# Altium PCB STM 32 F4 Robusta V1.PcbDoc (part 1 of 7)
Units mm, origin at the board's own origin, x right, y up, seen from the top; angles counter-clockwise.
Board outline 287.78 x 230 mm, 2 copper layers (Top Layer, Bottom Layer); 54 components, 96 nets, 355 pads, 16 vias.
Unrouted connection lines stored in the file: 3.
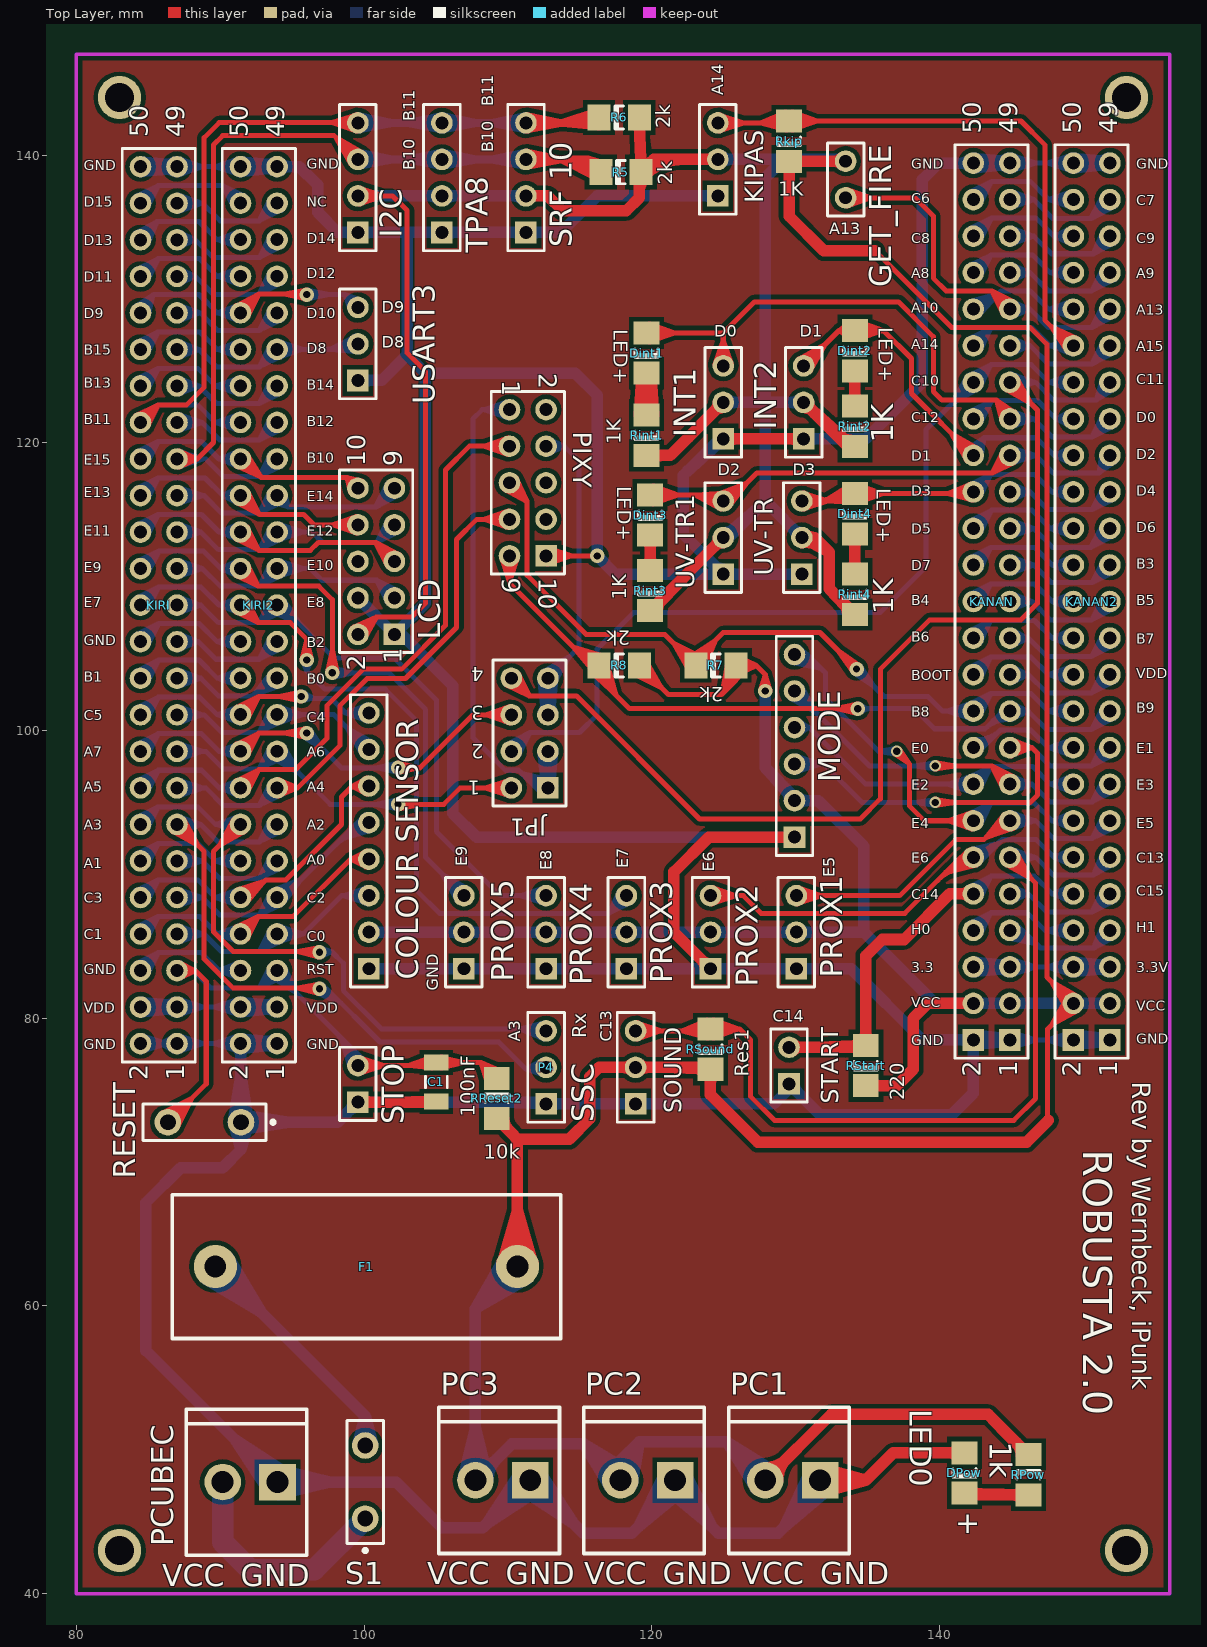
[diagram p0: Top Layer view]
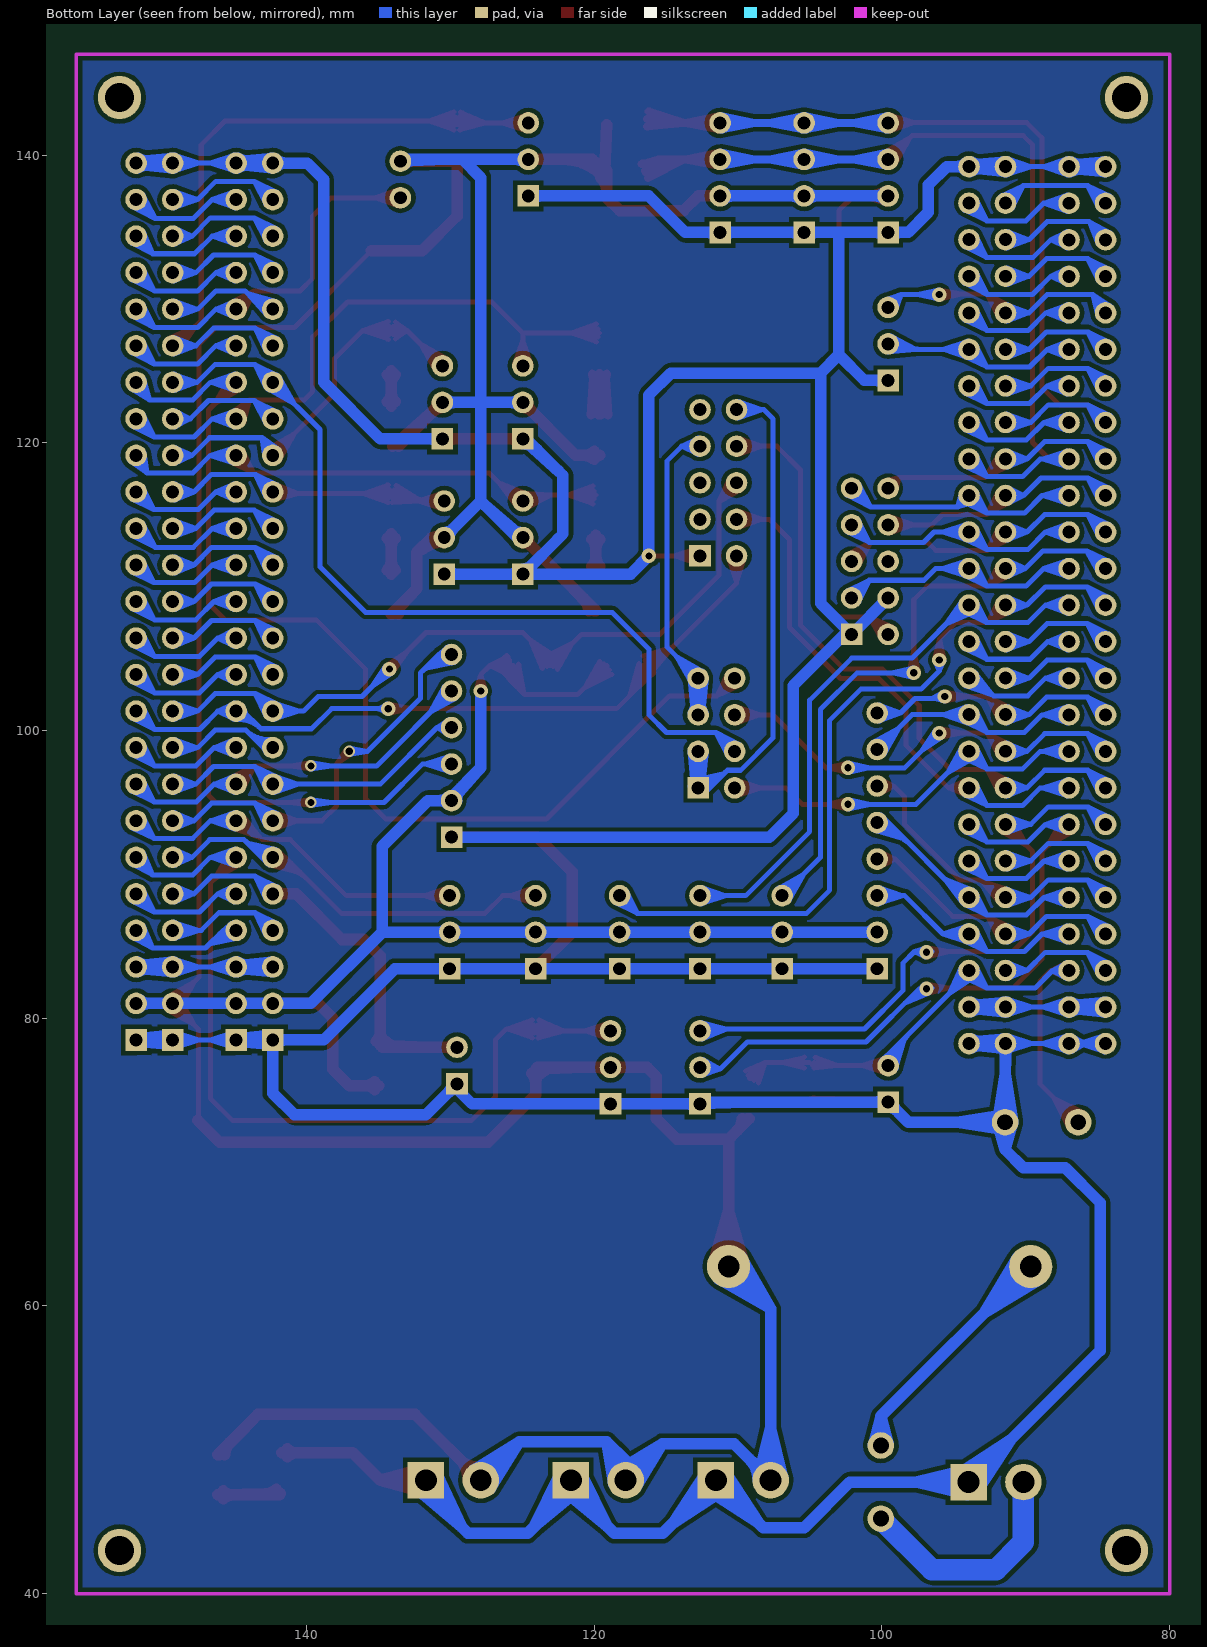
[diagram p1: Bottom Layer view, seen from below]

## Layer stack, top to bottom
Top Solder: solder mask 0.0102, Solder Resist, Dk 3.5
Top Layer: signal copper 0.0356
Dielectric1: dielectric 0.32, FR-4, Dk 4.8
Bottom Layer: signal copper 0.0356
Bottom Solder: solder mask 0.0102, Solder Resist, Dk 3.5

## Board outline
5.461,229.997 4.191,228.727 1.143,228.727 287.655,228.727 288.925,229.997 281.813,222.885 281.813,0 14.478,0 2.667,11.811 4.826,13.97 4.826,14.351

## Design rules (kind name [scope] priority, off if disabled: settings)
Clearance [All] p1: gap=0.3
PolygonConnect [All] p1: connectstyle=Relief reliefconductorwidth=0.254 reliefentries=4 polygonreliefangle="90 Angle" airgapwidth=0.254
RoutingVias [All] p1: holewidth=0.711 width=1.27 viastyle="Through Hole" minholewidth=0.711 minwidth=1.27 maxholewidth=0.711 maxwidth=1.27
SilkToSolderMaskClearance SilkscreenOverComponentPads [IsPad] p1: minsilkscreentomaskgap=0.254 clearancetoexposedcopper=TRUE
SolderMaskExpansion [All] p1: expansion=0.102
Width [All] p1: maxlimit=2 minlimit=0.35 preferedwidth=0.35 minimp=50.000000 maximp=50.000000 favimp=50.000000
28 further rules are at their usual default settings.

## Components (designator, comment, footprint, x,y, rotation, side; value= is the part's Value field where it differs from the comment)
C1 "100nF" C1206 105.029,75.565 r90 top
"COLOUR SENSOR" "Header 8" HDR1X8 100.33,83.439 r90 top
Dint1 "LED+" 1206 119.634,126.238 r90 top
Dint2 "LED+" 1206 134.112,126.407 r90 top
Dint3 "LED+" 1206 119.888,114.977 r90 top
Dint4 "LED+" 1206 134.112,115.062 r90 top
DPow "LED0" 1206 141.732,48.387 r90 top
F1 "Fuse 2" PCBComponent_1 89.662,62.738 r0 top
GET_FIRE "Header 2" HDR1X2#1 133.477,139.573 r270 top
I2C "I2C 1" HDR1X4 99.568,134.62 r90 top
INT1 "Header 3" HDR1X3 124.968,120.269 r90 top
INT2 "Header 3" HDR1X3 130.556,120.269 r90 top
JP1 "Header 4X2" HDR2X4 112.776,96.012 r90 top
KANAN "KANAN" HDR2X25#1 144.89,78.486 r90 top
KANAN2 "KANAN 2" HDR2X25#1 151.845,78.486 r90 top
KIPAS "Header 3" HDR1X3 124.587,137.16 r90 top
KIRI "KIRI" HDR2X25#2 86.995,78.232 r90 top locked
KIRI2 "KIRI 2" HDR2X25#2 93.95,78.237 r90 top
LCD "Header 5X2" HDR2X5#1 102.108,106.68 r90 top
MODE "Header 6" HDR1X6 129.921,92.583 r90 top
P4 "SSC" HDR1X3 112.649,74.041 r90 top
PC1 "Power Connector" "My_ Power_Connector" 124.079,52.959 r0 top
PC2 "Power Connector" "My_ Power_Connector" 114.004,52.959 r0 top
PC3 "Power Connector" "My_ Power_Connector" 103.928,52.959 r0 top
PCUBEC "Power Connector" "My_ Power_Connector" 86.36,52.832 r0 top
PIXY "Header 5X2" HDR2X5#2 110.109,122.301 r270 top
PROX1 "Header 3" HDR1X3 130.048,83.439 r90 top
PROX2 "Header 3" HDR1X3 124.079,83.439 r90 top
PROX3 "Header 3" HDR1X3 118.237,83.439 r90 top
PROX4 "Header 3" HDR1X3 112.649,83.439 r90 top
PROX5 "Header 3" HDR1X3 106.934,83.439 r90 top
R5 "2k" 1206 117.856,138.811 r0 top
R6 "2k" 1206 117.729,142.621 r0 top
R7 "2k" 1206 124.46,104.521 r0 top
R8 "2k" 1206 117.729,104.521 r0 top
RESET "SW-PB" SPST-2 88.9,72.771 r180 top
Rint1 "1K" 1206 119.634,120.523 r90 top
Rint2 "1K" 1206 134.112,121.158 r90 top
Rint3 "1K" 1206 119.888,109.728 r90 top
Rint4 "1K" 1206 134.112,109.474 r90 top
Rkip "1K" 1206 129.54,140.97 r90 top
RPow "1k" 1206 146.177,48.26 r270 top
RReset2 "10k" 1206 109.22,74.422 r270 top
RSound "Res1" 1206 124.079,77.851 r90 top
RStart "220" 1206 134.874,76.708 r90 top
S1 "SW-SPST" SPST-2 100.076,47.752 r90 top
SOUND "Header 3" HDR1X3 118.872,74.041 r90 top
"SRF 10" "I2C 1" HDR1X4 111.252,134.62 r90 top
START "Header 2" HDR1X2#2 129.54,75.438 r90 top
STOP "Header 2" HDR1X2#3 99.568,76.708 r270 top
TPA8 "I2C 1" HDR1X4 105.41,134.62 r90 top (schematic designator "TPA 8")
USART3 "USART 3" HDR1X3 99.568,124.333 r90 top
UV-TR "Header 3" HDR1X3 130.429,110.871 r90 top (schematic designator "UV TRON")
UV-TR1 "Header 3" HDR1X3 124.968,110.871 r90 top (schematic designator "UV TRON-1")

## Footprints (in the part's own frame and the unit in brackets; to place one, negate y for a bottom-side part, rotate by r counter-clockwise, add the part's x,y. Pads: shape width x height; smd on the part's side, far side on the other; paste and mask are expansions set on the pad)
1206 [mm] "Chip Capacitor; Body 3.2 x 1.6 mm (LxW typ)"
  rect 1.6x1.8 smd: 1(-1.4,0) 2(1.4,0)
  silkscreen extent -0.3,-0.8 0.3,0.8
C1206 [mm] "Chip Capacitor, Body 3.2x1.6mm, IPC High Density"
  rect 1.1x1.7 smd: 1(-1.35,0) 2(1.35,0)
  silkscreen extent -0.4,-0.75 0.4,0.75, body extent -1.7,-0.9 1.7,0.9, height 1.3
HDR1X2#1 [mm] "Connector; Header; 2 Position"
  round 1.5 hole 0.9: 1(0,0) 2(2.54,0)
  silkscreen extent -1.27,-1.27 3.81,1.27
HDR1X2#2 [mm] "Connector; Header; 2 Position"
  rect 1.5x1.5 hole 0.9: 1(0,0)
  round 1.5 hole 0.9: 2(2.54,0)
  silkscreen extent -1.27,-1.27 3.81,1.27
HDR1X2#3 [mm] "Connector; Header; 2 Position"
  round 1.5 hole 0.9: 1(0,0)
  rect 1.5x1.5 hole 0.9: 2(2.54,0)
  silkscreen extent -1.27,-1.27 3.81,1.27
HDR1X3 [mm] "Connector; Header; 3 Position"
  rect 1.5x1.5 hole 0.9: 1(0,0)
  round 1.5 hole 0.9: 2(2.54,0) 3(5.08,0)
  silkscreen extent -1.27,-1.27 6.35,1.27
HDR1X4 [mm] "Connector; Header; 4 Position"
  rect 1.5x1.5 hole 0.9: 1(0,0)
  round 1.5 hole 0.9: 2(2.54,0) 3(5.08,0) 4(7.62,0)
  silkscreen extent -1.27,-1.27 8.89,1.27
HDR1X6 [mm] "Connector; Header; 6 Position"
  rect 1.5x1.5 hole 0.9: 1(0,0)
  round 1.5 hole 0.9: 2(2.54,0) 3(5.08,0) 4(7.62,0) 5(10.16,0) 6(12.7,0)
  silkscreen extent -1.27,-1.27 13.97,1.27
HDR1X8 [mm] "Connector; Header; 8 Position"
  rect 1.5x1.5 hole 0.9: 1(0,0)
  round 1.5 hole 0.9: 2(2.54,0) 3(5.08,0) 4(7.62,0) 5(10.16,0) 6(12.7,0) 7(15.24,0) 8(17.78,0)
  silkscreen extent -1.27,-1.27 19.05,1.27
HDR2X4 [mm] "Connector; Header; 4x2 Position"
  rect 1.5x1.5 hole 0.9: 1(0,0)
  round 1.5 hole 0.9: 2(0,2.54) 3(2.54,0) 4(2.54,2.54) 5(5.08,0) 6(5.08,2.54) 7(7.62,0) 8(7.62,2.54)
  silkscreen extent -1.27,-1.27 8.89,3.81
HDR2X5#1 [mm] "Connector; Header; 5x2 Position"
  rect 1.5x1.5 hole 0.9: 1(0,0)
  round 1.5 hole 0.9: 2(0,2.54) 3(2.54,0) 4(2.54,2.54) 5(5.08,0) 6(5.08,2.54) 7(7.62,0) 8(7.62,2.54) 9(10.16,0) 10(10.16,2.54)
  silkscreen extent -1.27,-1.27 11.43,3.81
HDR2X5#2 [mm] "Connector; Header; 5x2 Position"
  round 1.5 hole 0.9: 1(0,0) 2(0,2.54) 3(2.54,0) 4(2.54,2.54) 5(5.08,0) 6(5.08,2.54) 7(7.62,0) 8(7.62,2.54) 9(10.16,0)
  rect 1.5x1.5 hole 0.9: 10(10.16,2.54)
  silkscreen extent -1.27,-1.27 11.43,3.81
HDR2X25#1 [mm] "Connector; Header; 25x2 Position"
  rect 1.5x1.5 hole 0.9: 1(0,0) 2(0,2.54)
  round 1.5 hole 0.9: 3(2.54,0) 4(2.54,2.54) 5(5.08,0) 6(5.08,2.54) 7(7.62,0) 8(7.62,2.54) 9(10.16,0) 10(10.16,2.54) 11(12.7,0) 12(12.7,2.54) 13(15.24,0) 14(15.24,2.54) 15(17.78,0) 16(17.78,2.54) 17(20.32,0) 18(20.32,2.54) 19(22.86,0) 20(22.86,2.54) 21(25.4,0) 22(25.4,2.54) 23(27.94,0) 24(27.94,2.54) 25(30.48,0) 26(30.48,2.54) 27(33.02,0) 28(33.02,2.54) 29(35.56,0) 30(35.56,2.54) 31(38.1,0) 32(38.1,2.54) 33(40.64,0) 34(40.64,2.54) 35(43.18,0) 36(43.18,2.54) 37(45.72,0) 38(45.72,2.54) 39(48.26,0) 40(48.26,2.54) 41(50.8,0) 42(50.8,2.54) 43(53.34,0) 44(53.34,2.54) 45(55.88,0) 46(55.88,2.54) 47(58.42,0) 48(58.42,2.54) 49(60.96,0) 50(60.96,2.54)
  silkscreen extent -1.27,-1.27 62.23,3.81
HDR2X25#2 [mm] "Connector; Header; 25x2 Position"
  round 1.5 hole 0.9: 1(0,0) 2(0,2.54) 3(2.54,0) 4(2.54,2.54) 5(5.08,0) 6(5.08,2.54) 7(7.62,0) 8(7.62,2.54) 9(10.16,0) 10(10.16,2.54) 11(12.7,0) 12(12.7,2.54) 13(15.24,0) 14(15.24,2.54) 15(17.78,0) 16(17.78,2.54) 17(20.32,0) 18(20.32,2.54) 19(22.86,0) 20(22.86,2.54) 21(25.4,0) 22(25.4,2.54) 23(27.94,0) 24(27.94,2.54) 25(30.48,0) 26(30.48,2.54) 27(33.02,0) 28(33.02,2.54) 29(35.56,0) 30(35.56,2.54) 31(38.1,0) 32(38.1,2.54) 33(40.64,0) 34(40.64,2.54) 35(43.18,0) 36(43.18,2.54) 37(45.72,0) 38(45.72,2.54) 39(48.26,0) 40(48.26,2.54) 41(50.8,0) 42(50.8,2.54) 43(53.34,0) 44(53.34,2.54) 45(55.88,0) 46(55.88,2.54) 47(58.42,0) 48(58.42,2.54) 49(60.96,0) 50(60.96,2.54)
  silkscreen extent -1.27,-1.27 62.23,3.81
"My_ Power_Connector" [mil]
  round 100 hole 60: 1(150,-200)
  rect 100x100 hole 60: 2(300,-200)
  silkscreen extent 50,-400 380,0
PCBComponent_1 [mm]
  round 3 hole 1.5: 1(0,0) 2(21,0)
  silkscreen extent -3,-5 24,5
SPST-2 [mm] "Circuit Breaker; 2 Leads"
  round 1.85 hole 1.1: 1(-2.54,0) 2(2.54,0)
  silkscreen extent -4.89,-1.27 4.28,1.27

## Part data
C1: library part Cap, "Capacitor"
"COLOUR SENSOR": "Header, 8-Pin"
Dint1 Dint2 Dint3 Dint4: library part LED0, "Typical INFRARED GaAs LED"
DPow: "Typical INFRARED GaAs LED"
F1: "Fuse"
GET_FIRE START STOP: "Header, 2-Pin"
I2C "SRF 10" TPA8: library part "Header 4", "Header, 4-Pin"
INT1 INT2 KIPAS PROX1 PROX2 PROX3 PROX4 PROX5 SOUND UV-TR UV-TR1: "Header, 3-Pin"
JP1: "Header, 4-Pin, Dual row"
KANAN KANAN2 KIRI KIRI2: library part "Header 25X2", "Header, 25-Pin, Dual row"
LCD PIXY: "Header, 5-Pin, Dual row"
MODE: "Header, 6-Pin"
P4 USART3: library part "Header 3", "Header, 3-Pin"
PC1 PC2 PC3 PCUBEC: "white Power Connector"
R5 R6 R7 R8: library part Res2, "Resistor"
RESET: "Switch"
Rint1 Rint2 Rint3 Rint4 Rkip RPow RReset2 RStart: library part Res1, "Resistor"
RSound: "Resistor"
S1: "Single-Pole, Single-Throw Switch"

## Free pads (board coordinates)
  round 3 hole 2: 0(83,144) 1(153,144) 2(83,43) 2(153,43)

## Via types
v1: diameter 1, hole 0.5, Top Layer to Bottom Layer, 13 vias
v2: diameter 0.8, hole 0.5, Top Layer to Bottom Layer, 3 vias

## Nets (pads, with @x,y where several pads share a name; then routed paths per layer and width w, separated by ;. In a path a pad name is that pad's centre, name@x,y a point inside that pad or via, vN(x,y) a via of type N, cw(c..) or ccw(c..) an arc to the next point about the centre after c; other vN are vias at no path point)
GND: "COLOUR SENSOR.1" "SRF 10.1" C1.1 DPow.2 I2C.1 INT1.1 INT2.1 KANAN2.1 KANAN2.2 KANAN2.49 KANAN2.50 KANAN.1 KANAN.2 KANAN.49 KANAN.50 KIPAS.1 KIRI2.1 KIRI2.2 KIRI2.6 KIRI2.24 KIRI2.49 KIRI2.50 KIRI.1 KIRI.2 KIRI.6 KIRI.24 KIRI.49 KIRI.50 LCD.1 LCD.4 MODE.1 P4.1 PC1.2 PC2.2 PC3.2 PCUBEC.2 PIXY.10 PROX1.1 PROX2.1 PROX3.1 PROX4.1 PROX5.1 RESET.1 SOUND.1 START.1 STOP.2 TPA8.1 USART3.1 UV-TR1.1 UV-TR.1 | length 1569.1
  Top Layer w0.35: PIXY.10@112.649,112.141 v1(116.205,112.141) ; PIXY.10@112.663,111.916 114.449,112.141 ; PIXY.10@112.663,112.366 114.449,112.141 ; PIXY.10@112.741,111.573 114.449,112.141 ; PIXY.10@112.741,112.709 114.449,112.141
  Top Layer w0.8: STOP.2@99.568,74.168 C1.1@104.982,74.168 ; STOP.2@99.815,73.921 cw(c100.413,73.323) 100.413,74.168 cw(c100.413,75.013) STOP.2@99.815,74.415 ; 101.778,74.168 C1.1@104.729,74.215 ; 121.632,85.886 PROX2.1@124.079,83.439 121.539,85.979 121.539,90.17 123.952,92.583 MODE.1@129.921,92.583 ; PROX2.1@123.729,83.439 ccw(c122.884,83.439) 123.482,84.036 ccw(c124.079,84.634) PROX2.1@124.079,83.789 ; INT1.1@124.968,120.269 INT2.1@130.556,120.269 127.406,120.269 ; INT1.1@125.215,120.022 cw(c125.813,119.424) 125.813,120.269 cw(c125.813,121.114) INT1.1@125.215,120.516 ; MODE.1@129.674,92.336 ccw(c129.076,91.738) 129.076,92.583 ccw(c129.076,93.428) MODE.1@129.674,92.83 ; INT2.1@130.309,120.022 ccw(c129.711,119.424) 129.711,120.269 ccw(c129.711,121.114) INT2.1@130.309,120.516 ; PC1.2@131.818,47.017 134.874,47.879 ; PC1.2@131.818,48.741 134.874,47.879 ; PC1.2@131.903,47.033 133.256,47.807 ; PC1.2@131.903,48.725 133.256,47.951 ; PC1.2@131.98,47.056 133.256,47.951 ; PC1.2@131.98,48.702 133.256,47.807 ; PC1.2@132.314,47.264 cw(c133.799,45.779) 133.799,47.879 cw(c133.799,49.979) PC1.2@132.314,48.494 ; 138.432,49.787 DPow.2@141.632,49.787 ; DPow.2@141.349,49.504 ccw(c140.666,48.821) 140.666,49.787 ccw(c140.666,50.753) DPow.2@141.349,50.07 ; DPow.2@141.732,49.787 136.782,49.787 134.874,47.879 ; PC1.2@131.699,47.879 133.256,47.951 ; PC1.2@131.699,47.879 133.256,47.807 ; PC1.2@131.699,47.879 134.874,47.879
  Bottom Layer w0.35: KIRI.6@84.119,83.778 85.725,84.582 ; KIRI.24@84.119,106.638 85.725,107.442 ; KIRI.24@84.155,106.663 85.149,106.933 ; KIRI.24@84.202,106.688 85.216,106.866 ; KIRI.6@84.306,83.481 85.725,84.582 ; KIRI.24@84.322,106.354 85.216,106.866 ; KIRI.50@84.423,138.969 KIRI.49@86.357,138.806 ; KIRI.50@84.423,139.415 KIRI.49@86.357,139.578 ; KIRI.50@84.425,138.618 KIRI.49@86.357,138.806 ; KIRI.50@84.425,139.766 KIRI.49@86.357,139.578 ; KIRI.50@84.452,138.967 KIRI.49@86.304,139.053 ; KIRI.50@84.452,139.417 KIRI.49@86.304,139.331 ; KIRI.2@84.455,78.232 KIRI.1@86.255,78.237 ; KIRI.6@84.455,83.312 85.725,84.582 ; KIRI.24@84.455,106.747 ccw(c84.455,108.135) 85.437,107.154 ccw(c86.418,106.172) KIRI.24@85.03,106.172 ; KIRI.2@84.46,78.237 KIRI2.2@91.41,78.237 ; KIRI.2@84.468,78.457 KIRI.1@86.255,78.237 ; KIRI.2@84.47,78.007 KIRI.1@86.255,78.237 ; KIRI.50@84.486,138.969 KIRI.49@86.304,139.331 ; KIRI.50@84.486,139.415 KIRI.49@86.304,139.053 ; KIRI.50@84.49,138.97 85.484,139.239 ; KIRI.50@84.49,139.414 85.484,139.145 ; KIRI.50@84.501,138.619 KIRI.49@86.304,139.053 ; KIRI.50@84.501,139.765 KIRI.49@86.304,139.331 ; KIRI.50@84.512,138.974 KIRI.49@86.357,139.578 ; KIRI.50@84.512,139.41 KIRI.49@86.357,138.806 ; KIRI.2@84.545,78.8 KIRI.1@86.255,78.237 ; KIRI.50@84.547,138.624 KIRI.49@86.255,139.192 ; KIRI.50@84.547,139.76 KIRI.49@86.255,139.192 ; KIRI.2@84.548,77.665 KIRI.1@86.255,78.237 ; KIRI.50@84.587,138.632 KIRI.49@86.304,139.331 ; KIRI.50@84.587,139.752 KIRI.49@86.304,139.053 ; KIRI.50@84.59,138.633 85.484,139.145 ; KIRI.50@84.59,139.751 85.484,139.239 ; KIRI.6@84.624,83.163 85.725,84.582 ; KIRI.24@84.637,106.039 85.149,106.933 ; KIRI.50@84.641,138.648 85.484,139.239 ; KIRI.50@84.641,139.736 85.484,139.145 ; KIRI.50@84.652,138.652 KIRI.49@86.357,139.578 ; KIRI.50@84.652,139.732 KIRI.49@86.357,138.806 ; KIRI.50@84.862,138.785 cw(c85.843,137.804) 85.843,139.192 cw(c85.843,140.58) KIRI.50@84.862,139.599 ; KIRI.6@84.921,82.976 85.725,84.582 ; KIRI.24@84.921,105.836 85.725,107.442 ; KIRI.24@84.946,105.872 85.216,106.866 ; KIRI.24@84.971,105.919 85.149,106.933 ; 85.595,78.237 cw(c85.595,76.832) KIRI.1@86.588,77.825 ; 85.619,78.237 ccw(c85.619,79.608) KIRI.1@86.588,78.639 ; KIRI.49@86.588,138.785 ccw(c85.607,137.804) 85.607,139.192 ccw(c85.607,140.58) KIRI.49@86.588,139.599 ; KIRI.1@86.806,77.689 85.974,78.284 ; KIRI.49@86.809,138.648 85.966,139.239 ; KIRI.49@86.809,139.736 85.966,139.145 ; KIRI.1@86.813,78.777 85.958,78.189 ; KIRI.1@86.859,77.673 85.958,78.189 ; KIRI.49@86.86,138.633 85.966,139.145 ; KIRI.49@86.86,139.751 85.966,139.239 ; KIRI.1@86.861,78.791 85.974,78.284 ; KIRI.49@86.903,138.624 KIRI.50@85.195,139.192 ; KIRI.49@86.903,139.76 KIRI.50@85.195,139.192 ; KIRI.1@86.959,78.01 85.974,78.284 ; KIRI.49@86.96,138.97 85.966,139.239 ; KIRI.49@86.96,139.414 85.966,139.145 ; KIRI.1@86.961,78.454 85.958,78.189 ; KIRI.1@86.98,78.008 85.958,78.189 ; KIRI.1@86.982,78.457 85.974,78.284 ; KIRI.1@87.029,78.454 88.032,78.189 ; KIRI.49@87.03,138.97 88.024,139.239 ; KIRI.49@87.03,139.414 88.024,139.145 ; KIRI.1@87.031,78.01 88.016,78.284 ; KIRI.1@87.085,78.8 88.795,78.237 ; KIRI.49@87.087,138.624 88.795,139.192 ; KIRI.49@87.087,139.76 88.795,139.192 ; KIRI.1@87.088,77.665 88.795,78.237 ; KIRI.1@87.129,78.791 88.016,78.284 ; KIRI.49@87.13,138.633 88.024,139.145 ; KIRI.49@87.13,139.751 88.024,139.239 ; KIRI.1@87.131,77.673 88.032,78.189 ; KIRI.1@87.177,78.777 88.032,78.189 ; KIRI.49@87.181,138.648 88.024,139.239 ; KIRI.49@87.181,139.736 88.024,139.145 ; KIRI.1@87.184,77.689 88.016,78.284 ; KIRI.1@87.402,77.825 cw(c88.395,76.832) 88.395,78.237 ; KIRI.1@87.402,78.639 ccw(c88.371,79.608) 88.371,78.237 ; KIRI.49@87.402,138.785 cw(c88.383,137.804) 88.383,139.192 cw(c88.383,140.58) KIRI.49@87.402,139.599 ; 90.01,139.192 ccw(c90.01,140.597) KIRI2.50@91.003,139.604 ; 90.034,139.192 cw(c90.034,137.821) KIRI2.50@91.003,138.79 ; KIRI2.2@91.003,77.83 ccw(c90.022,76.849) 90.022,78.237 ccw(c90.022,79.625) KIRI2.2@91.003,78.644 ; KIRI2.6@91.003,82.91 ccw(c90.022,81.929) 90.022,83.317 ccw(c90.022,84.705) KIRI2.6@91.003,83.724 ; KIRI2.24@91.003,105.77 ccw(c90.022,104.789) 90.022,106.177 ccw(c90.022,107.565) KIRI2.24@91.003,106.584 ; KIRI2.50@91.221,139.74 90.389,139.145 ; KIRI2.2@91.224,77.693 90.381,78.284 ; KIRI2.2@91.224,78.781 90.381,78.19 ; KIRI2.6@91.224,82.773 90.381,83.364 ; KIRI2.6@91.224,83.861 90.381,83.27 ; KIRI2.24@91.224,105.633 90.381,106.224 ; KIRI2.24@91.224,106.721 90.381,106.13 ; KIRI2.50@91.228,138.652 90.373,139.24 ; KIRI2.50@91.274,139.756 90.373,139.24 ; KIRI2.2@91.275,77.678 90.381,78.19 ; KIRI2.2@91.275,78.796 90.381,78.284 ; KIRI2.6@91.275,82.758 90.381,83.27 ; KIRI2.6@91.275,83.876 90.381,83.364 ; KIRI2.24@91.275,105.618 90.381,106.13 ; KIRI2.24@91.275,106.736 90.381,106.224 ; KIRI2.50@91.276,138.638 90.389,139.145 ; KIRI2.6@91.3,82.753 89.911,83.317 ; KIRI2.6@91.3,83.881 89.911,83.317 ; KIRI2.24@91.308,105.611 89.784,106.177 ; KIRI2.24@91.308,106.743 89.784,106.177 ; KIRI2.50@91.317,139.764 89.61,139.192 ; KIRI2.2@91.318,77.669 89.61,78.237 ; KIRI2.2@91.318,78.805 89.61,78.237 ; KIRI2.50@91.32,138.629 89.61,139.192 ; KIRI2.50@91.374,139.419 90.389,139.145 ; KIRI2.2@91.375,78.015 90.381,78.284 ; KIRI2.2@91.375,78.459 90.381,78.19 ; KIRI2.6@91.375,83.095 90.381,83.364 ; KIRI2.6@91.375,83.539 90.381,83.27 ; KIRI2.24@91.375,105.955 90.381,106.224 ; KIRI2.24@91.375,106.399 90.381,106.13 ; KIRI2.50@91.376,138.975 90.373,139.24 ; KIRI2.2@91.378,78.014 KIRI2.1@93.312,77.851 ; KIRI2.2@91.378,78.46 KIRI2.1@93.312,78.623 ; KIRI2.50@91.378,138.974 KIRI2.49@93.308,138.811 ; KIRI2.50@91.378,139.42 KIRI2.49@93.315,139.583 ; KIRI2.2@91.38,77.663 KIRI2.1@93.312,77.851 ; KIRI2.2@91.38,78.811 KIRI2.1@93.312,78.623 ; KIRI2.50@91.38,138.623 KIRI2.49@93.308,138.811 ; KIRI2.50@91.38,139.771 KIRI2.49@93.315,139.583 ; KIRI2.6@91.393,83.093 89.911,83.317 ; KIRI2.6@91.393,83.541 89.911,83.317 ; KIRI2.24@91.394,105.953 89.784,106.177 ; KIRI2.24@91.394,106.401 89.784,106.177 ; KIRI2.50@91.395,139.421 90.373,139.24 ; KIRI2.6@91.396,83.092 90.381,83.27 ; KIRI2.6@91.396,83.542 90.381,83.364 ; KIRI2.24@91.396,105.952 90.381,106.13 ; KIRI2.24@91.396,106.402 90.381,106.224 ; KIRI2.50@91.395,139.422 89.61,139.192 ; KIRI2.2@91.407,78.012 KIRI2.1@93.259,78.098 ; KIRI2.2@91.407,78.462 KIRI2.1@93.259,78.376 ; KIRI2.50@91.407,138.972 KIRI2.49@93.254,139.056 ; KIRI2.50@91.407,139.422 KIRI2.49@93.263,139.335 ; KIRI2.2@91.424,78.012 92.439,78.19 ; KIRI2.2@91.424,78.462 92.439,78.284 ; KIRI2.2@91.44,78.014 KIRI2.1@93.259,78.376 ; KIRI2.2@91.44,78.46 KIRI2.1@93.259,78.098 ; KIRI2.50@91.44,138.974 KIRI2.49@93.263,139.335 ; KIRI2.50@91.441,139.42 KIRI2.49@93.254,139.056 ; KIRI2.50@91.444,138.975 92.446,139.24 ; KIRI2.2@91.445,78.015 92.439,78.284 ; KIRI2.2@91.445,78.459 92.439,78.19 ; KIRI2.50@91.446,139.419 92.431,139.145 ; KIRI2.2@91.456,77.664 KIRI2.1@93.259,78.098 ; KIRI2.2@91.456,78.81 KIRI2.1@93.259,78.376 ; KIRI2.50@91.456,138.624 KIRI2.49@93.254,139.056 ; KIRI2.50@91.456,139.77 KIRI2.49@93.263,139.335 ; KIRI2.2@91.467,78.019 KIRI2.1@93.312,78.623 ; KIRI2.2@91.467,78.455 KIRI2.1@93.312,77.851 ; KIRI2.50@91.467,138.979 KIRI2.49@93.315,139.583 ; KIRI2.50@91.468,139.414 KIRI2.49@93.308,138.811 ; KIRI2.50@91.5,138.629 KIRI2.49@93.21,139.192 ; KIRI2.50@91.501,138.629 KIRI2.49@93.211,139.195 ; KIRI2.50@91.502,139.765 KIRI2.49@93.211,139.195 ; KIRI2.50@91.503,139.764 KIRI2.49@93.21,139.192 ; KIRI2.50@91.541,138.637 KIRI2.49@93.263,139.335 ; KIRI2.2@91.542,77.677 KIRI2.1@93.259,78.376 ; KIRI2.2@91.542,78.797 KIRI2.1@93.259,78.098 ; KIRI2.50@91.542,139.757 KIRI2.49@93.254,139.056 ; KIRI2.50@91.544,138.638 92.431,139.145 ; KIRI2.2@91.545,77.678 92.439,78.19 ; KIRI2.2@91.545,78.796 92.439,78.284 ; KIRI2.50@91.546,139.756 92.446,139.24 ; KIRI2.50@91.592,138.652 92.446,139.24 ; KIRI2.2@91.596,77.693 92.439,78.284 ; KIRI2.2@91.596,78.781 92.439,78.19 ; KIRI2.50@91.599,139.74 92.431,139.145 ; KIRI2.2@91.607,77.697 KIRI2.1@93.312,78.623 ; KIRI2.2@91.607,78.777 KIRI2.1@93.312,77.851 ; KIRI2.50@91.606,138.656 KIRI2.49@93.315,139.583 ; KIRI2.50@91.607,139.737 KIRI2.49@93.308,138.811 ; KIRI2.2@91.817,77.83 cw(c92.798,76.849) 92.798,78.237 cw(c92.798,79.625) KIRI2.2@91.817,78.644 ; KIRI2.50@91.817,138.79 cw(c92.786,137.821) 92.786,139.192 ; KIRI2.50@91.817,139.604 ccw(c92.81,140.597) 92.81,139.192 ; 92.55,139.192 ccw(c92.55,140.597) KIRI2.49@93.543,139.604 ; 92.574,139.192 cw(c92.574,137.821) KIRI2.49@93.543,138.79 ; KIRI2.1@93.543,77.83 ccw(c92.562,76.849) 92.562,78.237 ccw(c92.562,79.625) KIRI2.1@93.543,78.644 ; KIRI2.49@93.761,139.74 92.929,139.145 ; KIRI2.1@93.764,77.693 92.921,78.284 ; KIRI2.1@93.764,78.781 92.921,78.19 ; KIRI2.49@93.768,138.652 92.913,139.24 ; KIRI2.49@93.814,139.756 92.913,139.24 ; KIRI2.1@93.815,77.678 92.921,78.19 ; KIRI2.1@93.815,78.796 92.921,78.284 ; KIRI2.49@93.816,138.638 92.929,139.145 ; KIRI2.49@93.857,139.764 KIRI2.50@92.15,139.192 ; KIRI2.1@93.858,77.669 KIRI2.2@92.15,78.237 ; KIRI2.1@93.858,78.805 KIRI2.2@92.15,78.237 ; KIRI2.49@93.86,138.629 KIRI2.50@92.15,139.192 ; KIRI2.49@93.914,139.419 92.929,139.145 ; KIRI2.1@93.915,78.015 92.921,78.284 ; KIRI2.1@93.915,78.459 92.921,78.19 ; KIRI2.49@93.916,138.975 92.913,139.24 ; KIRI2.49@93.935,139.421 92.913,139.24 ; KIRI2.49@93.935,139.422 KIRI2.50@92.15,139.192 ; KIRI2.49@93.945,139.192 KIRI.49@86.995,139.192 ; KANAN.2@142.318,78.263 KANAN.1@144.252,78.1 ; KANAN.2@142.318,78.709 KANAN.1@144.252,78.872 ; KANAN.50@142.318,139.223 KANAN.49@144.252,139.06 ; KANAN.50@142.318,139.669 KANAN.49@144.252,139.832 ; KANAN.2@142.32,77.912 KANAN.1@144.252,78.1 ; KANAN.2@142.32,79.06 KANAN.1@144.252,78.872 ; KANAN.50@142.32,138.872 KANAN.49@144.252,139.06 ; KANAN.50@142.32,140.02 KANAN.49@144.252,139.832 ; KANAN.2@142.347,78.261 KANAN.1@144.199,78.347 ; KANAN.2@142.347,78.711 KANAN.1@144.199,78.625 ; KANAN.50@142.347,139.221 KANAN.49@144.199,139.307 ; KANAN.50@142.347,139.671 KANAN.49@144.199,139.585 ; KANAN.2@142.38,78.263 KANAN.1@144.199,78.625 ; KANAN.2@142.38,78.709 KANAN.1@144.199,78.347 ; KANAN.50@142.38,139.223 KANAN.49@144.199,139.585 ; KANAN.50@142.38,139.669 KANAN.49@144.199,139.307 ; KANAN.2@142.385,78.264 143.379,78.533 ; KANAN.2@142.385,78.708 143.379,78.439 ; KANAN.50@142.385,139.224 143.379,139.493 ; KANAN.50@142.385,139.668 143.379,139.399 ; KANAN.2@142.396,77.913 KANAN.1@144.199,78.347 ; KANAN.2@142.396,79.059 KANAN.1@144.199,78.625 ; KANAN.50@142.396,138.873 KANAN.49@144.199,139.307 ; KANAN.50@142.396,140.019 KANAN.49@144.199,139.585 ; KANAN.2@142.407,78.268 KANAN.1@144.252,78.872 ; KANAN.2@142.407,78.704 KANAN.1@144.252,78.1 ; KANAN.50@142.407,139.228 KANAN.49@144.252,139.832 ; KANAN.50@142.407,139.664 KANAN.49@144.252,139.06 ; KANAN.2@142.442,77.918 KANAN.1@144.15,78.486 ; KANAN.2@142.442,79.054 KANAN.1@144.15,78.486 ; KANAN.50@142.442,138.878 KANAN.49@144.15,139.446 ; KANAN.50@142.442,140.014 KANAN.49@144.15,139.446 ; KANAN.2@142.482,77.926 KANAN.1@144.199,78.625 ; KANAN.2@142.482,79.046 KANAN.1@144.199,78.347 ; KANAN.50@142.482,138.886 KANAN.49@144.199,139.585 ; KANAN.50@142.482,140.006 KANAN.49@144.199,139.307 ; KANAN.2@142.485,77.927 143.379,78.439 ; KANAN.2@142.485,79.045 143.379,78.533 ; KANAN.50@142.485,138.887 143.379,139.399 ; KANAN.50@142.485,140.005 143.379,139.493 ; KANAN.2@142.536,77.942 143.379,78.533 ; KANAN.2@142.536,79.03 143.379,78.439 ; KANAN.50@142.536,138.902 143.379,139.493 ; KANAN.50@142.536,139.99 143.379,139.399 ; KANAN.2@142.547,77.946 KANAN.1@144.252,78.872 ; KANAN.2@142.547,79.026 KANAN.1@144.252,78.1 ; KANAN.50@142.547,138.906 KANAN.49@144.252,139.832 ; KANAN.50@142.547,139.986 KANAN.49@144.252,139.06 ; KANAN.2@142.757,78.079 cw(c143.738,77.098) 143.738,78.486 cw(c143.738,79.874) KANAN.2@142.757,78.893 ; KANAN.50@142.757,139.039 cw(c143.738,138.058) 143.738,139.446 cw(c143.738,140.834) KANAN.50@142.757,139.853 ; KANAN.1@144.483,78.079 ccw(c143.502,77.098) 143.502,78.486 ccw(c143.502,79.874) KANAN.1@144.483,78.893 ; KANAN.49@144.483,139.039 ccw(c143.502,138.058) 143.502,139.446 ccw(c143.502,140.834) KANAN.49@144.483,139.853 ; KANAN.1@144.704,77.942 143.861,78.533 ; KANAN.1@144.704,79.03 143.861,78.439 ; KANAN.49@144.704,138.902 143.861,139.493 ; KANAN.49@144.704,139.99 143.861,139.399 ; KANAN.1@144.755,77.927 143.861,78.439 ; KANAN.1@144.755,79.045 143.861,78.533 ; KANAN.49@144.755,138.887 143.861,139.399 ; KANAN.49@144.755,140.005 143.861,139.493 ; KANAN.1@144.798,77.918 KANAN.2@143.09,78.486 ; KANAN.1@144.798,79.054 KANAN.2@143.09,78.486 ; KANAN.49@144.798,138.878 KANAN.50@143.09,139.446 ; KANAN.49@144.798,140.014 KANAN.50@143.09,139.446 ; KANAN.1@144.855,78.264 143.861,78.533 ; KANAN.1@144.855,78.708 143.861,78.439 ; KANAN.49@144.855,139.224 143.861,139.493 ; KANAN.49@144.855,139.668 143.861,139.399 ; KANAN.1@144.876,78.261 143.861,78.439 ; KANAN.1@144.876,78.711 143.861,78.533 ; KANAN.49@144.876,139.221 143.861,139.399 ; KANAN.49@144.876,139.671 143.861,139.493 ; KANAN.1@144.876,78.261 KANAN.2@143.09,78.486 ; KANAN.1@144.876,78.711 KANAN.2@143.09,78.486 ; KANAN.49@144.876,139.221 KANAN.50@143.09,139.446 ; KANAN.49@144.876,139.671 KANAN.50@143.09,139.446 ; KANAN.1@144.925,78.264 145.919,78.533 ; KANAN.1@144.925,78.708 145.919,78.439 ; KANAN.49@144.925,139.224 145.919,139.493 ; KANAN.49@144.925,139.668 145.919,139.399 ; KANAN.1@144.982,77.918 146.69,78.486 ; KANAN.1@144.982,79.054 146.69,78.486 ; KANAN.49@144.982,138.878 146.69,139.446 ; KANAN.49@144.982,140.014 146.69,139.446 ; KANAN.1@145.025,77.927 145.919,78.439 ; KANAN.1@145.025,79.045 145.919,78.533 ; KANAN.49@145.025,138.887 145.919,139.399 ; KANAN.49@145.025,140.005 145.919,139.493 ; KANAN.1@145.076,77.942 145.919,78.533 ; KANAN.1@145.076,79.03 145.919,78.439 ; KANAN.49@145.076,138.902 145.919,139.493 ; KANAN.49@145.076,139.99 145.919,139.399 ; KANAN.1@145.297,78.079 cw(c146.278,77.098) 146.278,78.486 cw(c146.278,79.874) KANAN.1@145.297,78.893 ; KANAN.49@145.297,139.039 cw(c146.278,138.058) 146.278,139.446 cw(c146.278,140.834) KANAN.49@145.297,139.853 ; KANAN2.2@148.898,78.079 ccw(c147.917,77.098) 147.917,78.486 ccw(c147.917,79.874) KANAN2.2@148.898,78.893 ; KANAN2.50@148.898,139.039 ccw(c147.917,138.058) 147.917,139.446 ccw(c147.917,140.834) KANAN2.50@148.898,139.853 ; KANAN2.2@149.119,77.942 148.276,78.533 ; KANAN2.2@149.119,79.03 148.276,78.439 ; KANAN2.50@149.119,138.902 148.276,139.493 ; KANAN2.50@149.119,139.99 148.276,139.399 ; KANAN2.2@149.17,77.927 148.276,78.439 ; KANAN2.2@149.17,79.045 148.276,78.533 ; KANAN2.50@149.17,138.887 148.276,139.399 ; KANAN2.50@149.17,140.005 148.276,139.493 ; KANAN2.2@149.213,77.918 147.505,78.486 ; KANAN2.2@149.213,79.054 147.505,78.486 ; KANAN2.50@149.213,138.878 147.505,139.446 ; KANAN2.50@149.213,140.014 147.505,139.446 ; KANAN2.2@149.27,78.264 148.276,78.533 ; KANAN2.2@149.27,78.708 148.276,78.439 ; KANAN2.50@149.27,139.224 148.276,139.493 ; KANAN2.50@149.27,139.668 148.276,139.399 ; KANAN2.2@149.273,78.263 KANAN2.1@151.207,78.1 ; KANAN2.2@149.273,78.709 KANAN2.1@151.207,78.872 ; KANAN2.50@149.273,139.223 KANAN2.49@151.207,139.06 ; KANAN2.50@149.273,139.669 KANAN2.49@151.207,139.832 ; KANAN2.2@149.275,77.912 KANAN2.1@151.207,78.1 ; KANAN2.2@149.275,79.06 KANAN2.1@151.207,78.872 ; KANAN2.50@149.275,138.872 KANAN2.49@151.207,139.06 ; KANAN2.50@149.275,140.02 KANAN2.49@151.207,139.832 ; KANAN2.2@149.302,78.261 KANAN2.1@151.154,78.347 ; KANAN2.2@149.302,78.711 KANAN2.1@151.154,78.625 ; KANAN2.50@149.302,139.221 KANAN2.49@151.154,139.307 ; KANAN2.50@149.302,139.671 KANAN2.49@151.154,139.585 ; KANAN2.2@149.336,78.263 KANAN2.1@151.154,78.625 ; KANAN2.2@149.336,78.709 KANAN2.1@151.154,78.347 ; KANAN2.50@149.336,139.223 KANAN2.49@151.154,139.585 ; KANAN2.50@149.336,139.669 KANAN2.49@151.154,139.307 ; KANAN2.2@149.34,78.264 150.334,78.533 ; KANAN2.2@149.34,78.708 150.334,78.439 ; KANAN2.50@149.34,139.224 150.334,139.493 ; KANAN2.50@149.34,139.668 150.334,139.399 ; KANAN2.2@149.351,77.913 KANAN2.1@151.154,78.347 ; KANAN2.2@149.351,79.059 KANAN2.1@151.154,78.625 ; KANAN2.50@149.351,138.873 KANAN2.49@151.154,139.307 ; KANAN2.50@149.351,140.019 KANAN2.49@151.154,139.585 ; KANAN2.2@149.362,78.268 KANAN2.1@151.207,78.872 ; KANAN2.2@149.362,78.704 KANAN2.1@151.207,78.1 ; KANAN2.50@149.362,139.228 KANAN2.49@151.207,139.832 ; KANAN2.50@149.362,139.664 KANAN2.49@151.207,139.06 ; KANAN2.2@149.397,77.918 KANAN2.1@151.105,78.486 ; KANAN2.2@149.397,79.054 KANAN2.1@151.105,78.486 ; KANAN2.50@149.397,138.878 KANAN2.49@151.105,139.446 ; KANAN2.50@149.397,140.014 KANAN2.49@151.105,139.446 ; KANAN2.2@149.437,77.926 KANAN2.1@151.154,78.625 ; KANAN2.2@149.437,79.046 KANAN2.1@151.154,78.347 ; KANAN2.50@149.437,138.886 KANAN2.49@151.154,139.585 ; KANAN2.50@149.437,140.006 KANAN2.49@151.154,139.307 ; KANAN2.2@149.44,77.927 150.334,78.439 ; KANAN2.2@149.44,79.045 150.334,78.533 ; KANAN2.50@149.44,138.887 150.334,139.399 ; KANAN2.50@149.44,140.005 150.334,139.493 ; KANAN2.2@149.491,77.942 150.334,78.533 ; KANAN2.2@149.491,79.03 150.334,78.439 ; KANAN2.50@149.491,138.902 150.334,139.493 ; KANAN2.50@149.491,139.99 150.334,139.399 ; KANAN2.2@149.502,77.946 KANAN2.1@151.207,78.872 ; KANAN2.2@149.502,79.026 KANAN2.1@151.207,78.1 ; KANAN2.50@149.502,138.906 KANAN2.49@151.207,139.832 ; KANAN2.50@149.502,139.986 KANAN2.49@151.207,139.06 ; KANAN2.2@149.712,78.079 cw(c150.693,77.098) 150.693,78.486 cw(c150.693,79.874) KANAN2.2@149.712,78.893 ; KANAN2.50@149.712,139.039 cw(c150.693,138.058) 150.693,139.446 cw(c150.693,140.834) KANAN2.50@149.712,139.853 ; KANAN2.1@151.438,78.079 ccw(c150.457,77.098) 150.457,78.486 ccw(c150.457,79.874) KANAN2.1@151.438,78.893 ; KANAN2.49@151.438,139.039 ccw(c150.457,138.058) 150.457,139.446 ccw(c150.457,140.834) KANAN2.49@151.438,139.853 ; KANAN2.1@151.659,77.942 150.816,78.533 ; KANAN2.1@151.659,79.03 150.816,78.439 ; KANAN2.49@151.659,138.902 150.816,139.493 ; KANAN2.49@151.659,139.99 150.816,139.399 ; KANAN2.1@151.71,77.927 150.816,78.439 ; KANAN2.1@151.71,79.045 150.816,78.533 ; KANAN2.49@151.71,138.887 150.816,139.399 ; KANAN2.49@151.71,140.005 150.816,139.493 ; KANAN2.1@151.753,77.918 KANAN2.2@150.045,78.486 ; KANAN2.1@151.753,79.054 KANAN2.2@150.045,78.486 ; KANAN2.49@151.753,138.878 KANAN2.50@150.045,139.446 ; KANAN2.49@151.753,140.014 KANAN2.50@150.045,139.446 ; KANAN2.1@151.81,78.264 150.816,78.533 ; KANAN2.1@151.81,78.708 150.816,78.439 ; KANAN2.49@151.81,139.224 150.816,139.493 ; KANAN2.49@151.81,139.668 150.816,139.399 ; KIRI.24@84.455,106.172 85.149,106.933 ; KIRI.24@84.455,106.172 85.216,106.866 ; KIRI.24@84.455,106.172 85.725,107.442 ; KIRI.50@84.455,139.192 KIRI.49@86.304,139.331 ; KIRI.50@84.455,139.192 KIRI.49@86.304,139.053 ; KIRI.50@84.455,139.192 KIRI.49@86.357,139.578 ; KIRI.50@84.455,139.192 KIRI.49@86.357,138.806 ; KIRI.50@84.455,139.192 85.484,139.239 ; KIRI.50@84.455,139.192 85.484,139.145 ; KIRI.50@84.455,139.192 KIRI.49@86.995,139.192 ; 85.149,106.933 84.306,106.341 85.725,107.442 ; KIRI.50@85.195,139.192 86.981,139.417 85.966,139.239 ; KIRI.50@85.195,139.192 86.981,138.967 85.966,139.145 ; 85.216,106.866 84.624,106.023 85.725,107.442 ; 85.484,139.145 84.469,138.967 KIRI.49@86.255,139.192 ; 85.484,139.239 84.469,139.417 KIRI.49@86.255,139.192 ; 85.725,84.582 88.646,84.582 89.911,83.317 ; 85.725,107.442 88.519,107.442 89.784,106.177 ; 85.958,78.189 KIRI.1@86.995,78.232 ; 85.966,139.145 KIRI.49@86.995,139.192 ; 85.966,139.239 KIRI.49@86.995,139.192 ; 85.974,78.284 KIRI.1@86.995,78.232 ; KIRI.1@86.995,78.232 88.795,78.237 ; KIRI.1@86.995,78.232 88.016,78.284 ; KIRI.1@86.995,78.232 88.032,78.189 ; KIRI.49@86.995,139.192 88.024,139.239 ; KIRI.49@86.995,139.192 88.024,139.145 ; 88.016,78.284 87.008,78.457 88.795,78.237 ; 88.024,139.145 87.009,138.967 88.795,139.192 ; 88.024,139.239 87.009,139.417 88.795,139.192 ; 88.032,78.189 87.01,78.008 88.795,78.237 ; 89.61,78.237 91.396,78.462 90.381,78.284 ; 89.61,78.237 91.396,78.012 90.381,78.19 ; 89.61,139.192 KIRI2.50@91.41,139.197 ; 89.61,139.192 91.397,138.972 90.389,139.145 ; 89.784,106.177 KIRI2.24@91.41,106.177 ; 89.784,106.177 KIRI2.24@91.41,106.177 ; 89.911,83.317 KIRI2.6@91.41,83.317 ; 89.911,83.317 KIRI2.6@91.41,83.317 ; 90.373,139.24 KIRI2.50@91.41,139.197 ; 90.381,78.19 KIRI2.2@91.41,78.237 ; 90.381,78.284 KIRI2.2@91.41,78.237 ; 90.381,83.27 KIRI2.6@91.41,83.317 ; 90.381,83.364 KIRI2.6@91.41,83.317 ; 90.381,106.13 KIRI2.24@91.41,106.177 ; 90.381,106.224 KIRI2.24@91.41,106.177 ; 90.389,139.145 KIRI2.50@91.41,139.197 ; KIRI2.2@91.41,78.237 KIRI2.1@93.21,78.237 ; KIRI2.2@91.41,78.237 KIRI2.1@93.259,78.376 ; KIRI2.2@91.41,78.237 KIRI2.1@93.259,78.098 ; KIRI2.2@91.41,78.237 KIRI2.1@93.312,78.623 ; KIRI2.2@91.41,78.237 KIRI2.1@93.312,77.851 ; KIRI2.2@91.41,78.237 92.439,78.284 ; KIRI2.2@91.41,78.237 92.439,78.19 ; KIRI2.2@91.41,78.237 KIRI2.1@93.95,78.237 ; KIRI2.50@91.41,139.197 KIRI2.49@93.21,139.192 ; KIRI2.50@91.41,139.197 KIRI2.49@93.211,139.195 ; KIRI2.50@91.41,139.197 KIRI2.49@93.263,139.335 ; KIRI2.50@91.41,139.197 KIRI2.49@93.254,139.056 ; KIRI2.50@91.41,139.197 KIRI2.49@93.315,139.583 ; KIRI2.50@91.41,139.197 KIRI2.49@93.308,138.811 ; KIRI2.50@91.41,139.197 92.446,139.24 ; KIRI2.50@91.41,139.197 92.431,139.145 ; KIRI2.50@91.423,138.972 KIRI2.49@93.21,139.192 ; KIRI2.50@91.424,138.972 KIRI2.49@93.211,139.195 ; KIRI2.50@91.423,138.972 92.431,139.145 ; KIRI2.50@91.425,139.422 KIRI2.49@93.21,139.192 ; KIRI2.50@91.424,139.422 KIRI2.49@93.211,139.195 ; KIRI2.50@91.425,139.421 92.446,139.24 ; KIRI2.2@92.15,78.237 KIRI2.1@93.95,78.237 ; KIRI2.2@92.15,78.237 93.936,78.462 92.921,78.284 ; KIRI2.2@92.15,78.237 93.936,78.012 92.921,78.19 ; KIRI2.50@92.15,139.192 KIRI2.49@93.95,139.197 ; KIRI2.50@92.15,139.192 93.937,138.972 92.929,139.145 ; 92.913,139.24 KIRI2.49@93.95,139.197 ; 92.921,78.19 KIRI2.1@93.95,78.237 ; 92.921,78.284 KIRI2.1@93.95,78.237 ; 92.929,139.145 KIRI2.49@93.95,139.197 ; KIRI2.1@93.21,78.237 91.424,78.012 KIRI2.1@93.21,78.237 ; KIRI2.1@93.21,78.237 91.424,78.462 KIRI2.1@93.21,78.237 ; KIRI2.1@93.21,78.237 91.502,77.669 KIRI2.1@93.21,78.237 ; KIRI2.1@93.21,78.237 91.502,78.805 KIRI2.1@93.21,78.237 ; KANAN.2@142.35,78.486 KANAN.1@144.199,78.625 ; KANAN.2@142.35,78.486 KANAN.1@144.199,78.347 ; KANAN.2@142.35,78.486 KANAN.1@144.252,78.872 ; KANAN.2@142.35,78.486 KANAN.1@144.252,78.1 ; KANAN.2@142.35,78.486 143.379,78.533 ; KANAN.2@142.35,78.486 143.379,78.439 ; KANAN.2@142.35,78.486 KANAN.1@144.89,78.486 ; KANAN.50@142.35,139.446 KANAN.49@144.199,139.585 ; KANAN.50@142.35,139.446 KANAN.49@144.199,139.307 ; KANAN.50@142.35,139.446 KANAN.49@144.252,139.832 ; KANAN.50@142.35,139.446 KANAN.49@144.252,139.06 ; KANAN.50@142.35,139.446 143.379,139.493 ; KANAN.50@142.35,139.446 143.379,139.399 ; KANAN.50@142.35,139.446 KANAN.49@144.89,139.446 ; 143.379,78.439 142.364,78.261 KANAN.1@144.15,78.486 ; 143.379,78.533 142.364,78.711 KANAN.1@144.15,78.486 ; 143.379,139.399 142.364,139.221 KANAN.49@144.15,139.446 ; 143.379,139.493 142.364,139.671 KANAN.49@144.15,139.446 ; 143.861,78.439 KANAN.1@144.89,78.486 ; 143.861,78.533 KANAN.1@144.89,78.486 ; 143.861,139.399 KANAN.49@144.89,139.446 ; 143.861,139.493 KANAN.49@144.89,139.446 ; KANAN.1@144.89,78.486 145.919,78.533 ; KANAN.1@144.89,78.486 145.919,78.439 ; KANAN.1@144.89,78.486 KANAN2.2@149.305,78.486 ; KANAN.49@144.89,139.446 145.919,139.493 ; KANAN.49@144.89,139.446 145.919,139.399 ; KANAN.49@144.89,139.446 KANAN2.50@149.305,139.446 ; 145.919,78.439 144.904,78.261 146.69,78.486 ; 145.919,78.533 144.904,78.711 146.69,78.486 ; 145.919,139.399 144.904,139.221 146.69,139.446 ; 145.919,139.493 144.904,139.671 146.69,139.446 ; 147.505,78.486 149.291,78.711 148.276,78.533 ; 147.505,78.486 149.291,78.261 148.276,78.439 ; 147.505,139.446 149.291,139.671 148.276,139.493 ; 147.505,139.446 149.291,139.221 148.276,139.399 ; 148.276,78.439 KANAN2.2@149.305,78.486 ; 148.276,78.533 KANAN2.2@149.305,78.486 ; 148.276,139.399 KANAN2.50@149.305,139.446 ; 148.276,139.493 KANAN2.50@149.305,139.446 ; KANAN2.2@149.305,78.486 KANAN2.1@151.154,78.625 ; KANAN2.2@149.305,78.486 KANAN2.1@151.154,78.347 ; KANAN2.2@149.305,78.486 KANAN2.1@151.207,78.872 ; KANAN2.2@149.305,78.486 KANAN2.1@151.207,78.1 ; KANAN2.2@149.305,78.486 150.334,78.533 ; KANAN2.2@149.305,78.486 150.334,78.439 ; KANAN2.2@149.305,78.486 KANAN2.1@151.845,78.486 ; KANAN2.50@149.305,139.446 KANAN2.49@151.154,139.585 ; KANAN2.50@149.305,139.446 KANAN2.49@151.154,139.307 ; KANAN2.50@149.305,139.446 KANAN2.49@151.207,139.832 ; KANAN2.50@149.305,139.446 KANAN2.49@151.207,139.06 ; KANAN2.50@149.305,139.446 150.334,139.493 ; KANAN2.50@149.305,139.446 150.334,139.399 ; KANAN2.50@149.305,139.446 KANAN2.49@151.845,139.446 ; KANAN2.2@150.045,78.486 151.831,78.711 150.816,78.533 ; KANAN2.2@150.045,78.486 151.831,78.261 150.816,78.439 ; KANAN2.50@150.045,139.446 151.831,139.671 150.816,139.493 ; KANAN2.50@150.045,139.446 151.831,139.221 150.816,139.399 ; 150.334,78.439 149.319,78.261 KANAN2.1@151.105,78.486 ; 150.334,78.533 149.319,78.711 KANAN2.1@151.105,78.486 ; 150.334,139.399 149.319,139.221 KANAN2.49@151.105,139.446 ; 150.334,139.493 149.319,139.671 KANAN2.49@151.105,139.446 ; 150.816,78.439 KANAN2.1@151.845,78.486 ; 150.816,78.533 KANAN2.1@151.845,78.486 ; 150.816,139.399 KANAN2.49@151.845,139.446 ; 150.816,139.493 KANAN2.49@151.845,139.446
  Bottom Layer w0.8: RESET.1@90.917,72.812 91.44,76.096 RESET.1@91.963,72.812 ; RESET.1@90.92,72.699 91.44,70.866 ; RESET.1@90.93,72.648 91.397,71.832 ; RESET.1@90.93,72.894 91.397,73.71 ; RESET.1@90.943,72.601 91.483,71.832 ; RESET.1@90.943,72.941 91.483,73.71 ; RESET.1@91.069,72.4 cw(c90.173,71.504) 91.44,71.504 cw(c92.707,71.504) 91.811,72.4 cw(c92.707,71.504) 92.707,72.771 cw(c92.707,74.038) 91.811,73.142 cw(c92.707,74.038) 91.44,74.038 cw(c90.173,74.038) RESET.1@91.069,73.142 ; KIRI2.2@91.162,77.989 cw(c90.493,77.32) 91.44,77.32 ; KIRI2.2@91.41,78.237 91.44,75.087 ; 91.44,77.464 cw(c92.182,77.464) KIRI2.2@91.657,77.989 ; KIRI2.2@91.44,78.207 RESET.1@91.44,72.771 ; RESET.1@91.481,72.248 94.765,72.771 RESET.1@91.481,73.294 ; RESET.1@91.563,72.261 92.379,72.728 ; RESET.1@91.563,73.281 92.379,72.814 ; RESET.1@91.61,72.274 92.379,72.814 ; RESET.1@91.61,73.268 92.379,72.728 ; RESET.1@91.937,72.601 91.397,71.832 ; RESET.1@91.937,72.941 91.397,73.71 ; RESET.1@91.95,72.648 91.483,71.832 ; RESET.1@91.95,72.894 91.483,73.71 ; RESET.1@91.96,72.699 91.44,70.866 ; PCUBEC.2@93.11,47.752 ccw(c91.01,47.752) 92.495,49.237 ccw(c93.98,50.722) PCUBEC.2@93.98,48.622 ; PCUBEC.2@93.304,47.204 91.013,50.719 ; KIRI2.49@93.95,139.197 95.499,139.197 96.774,137.922 96.774,136.017 98.171,134.62 I2C.1@99.568,134.62 TPA8.1@105.41,134.62 111.252,134.62 113.665,134.62 116.205,137.16 KIPAS.1@124.587,137.16 ; PCUBEC.2@94.083,46.888 97.65,47.752 PCUBEC.2@94.083,48.616 ; PCUBEC.2@94.184,46.906 95.537,47.68 ; PCUBEC.2@94.184,48.598 95.537,47.824 ; KIRI2.49@94.197,138.949 cw(c94.795,138.352) 94.795,139.197 cw(c94.795,140.042) KIRI2.49@94.197,139.444 ; PCUBEC.2@94.261,46.929 95.537,47.824 ; PCUBEC.2@94.261,48.575 95.537,47.68 ; PCUBEC.2@94.528,48.428 91.013,50.719 ; PCUBEC.2@94.595,47.137 cw(c96.08,45.652) 96.08,47.752 cw(c96.08,49.852) PCUBEC.2@94.595,48.367 ; STOP.2@99.218,74.168 cw(c98.373,74.168) 98.971,73.571 cw(c99.568,72.973) STOP.2@99.568,73.818 ; I2C.1@99.321,134.373 ccw(c98.723,133.775) 98.723,134.62 ccw(c98.723,135.465) I2C.1@99.321,134.867 ; LCD.4@99.568,109.22 LCD.1@102.108,106.68 ; USART3.1@99.568,124.333 101.219,124.333 102.997,126.111 ; STOP.2@99.815,73.921 cw(c100.413,73.323) 100.413,74.168 cw(c100.413,75.013) STOP.2@99.815,74.415 ; USART3.1@99.815,124.086 cw(c100.413,123.488) 100.413,124.333 cw(c100.413,125.178) USART3.1@99.815,124.58 ; I2C.1@99.815,134.373 cw(c100.413,133.775) 100.413,134.62 cw(c100.413,135.465) I2C.1@99.815,134.867 ; 100.33,83.439 PROX5.1@106.934,83.439 PROX4.1@112.649,83.439 PROX3.1@118.237,83.439 PROX2.1@124.079,83.439 PROX1.1@130.048,83.439 133.858,83.439 138.811,78.486 KANAN.2@142.35,78.486 142.35,74.786 140.843,73.279 131.699,73.279 129.715,75.263 START.1@129.54,75.438 ; 100.577,83.192 cw(c101.175,82.594) 101.175,83.439 cw(c101.175,84.284) 100.577,83.686 ; 102.997,134.493 102.997,126.111 ; TPA8.1@105.163,134.373 ccw(c104.565,133.775) 104.565,134.62 ccw(c104.565,135.465) TPA8.1@105.163,134.867 ; TPA8.1@105.657,134.373 cw(c106.255,133.775) 106.255,134.62 cw(c106.255,135.465) TPA8.1@105.657,134.867 ; PROX5.1@106.687,83.192 ccw(c106.089,82.594) 106.089,83.439 ccw(c106.089,84.284) PROX5.1@106.687,83.686 ; PROX5.1@107.181,83.192 cw(c107.779,82.594) 107.779,83.439 cw(c107.779,84.284) PROX5.1@107.181,83.686 ; 109.488,74.168 P4.1@112.649,74.041 ; PC3.2@110.678,47.879 cw(c108.578,47.879) 110.063,46.394 cw(c111.548,44.909) 111.548,47.009 cw(c111.548,44.909) 113.033,46.394 cw(c114.519,47.879) PC3.2@112.418,47.879 ; PC3.2@110.873,48.427 108.581,44.912 ; PC3.2@111,47.203 114.515,44.912 PC3.2@112.224,48.427 ; 111.005,134.373 ccw(c110.407,133.775) 110.407,134.62 ccw(c110.407,135.465) 111.005,134.867 ; 111.497,74.168 cw(c111.497,72.889) P4.1@112.402,73.794 ; 111.499,134.373 cw(c112.097,133.775) 112.097,134.62 cw(c112.097,135.465) 111.499,134.867 ; 111.828,74.124 P4.1@112.649,74.041 ; PC3.2@112.096,47.203 108.581,44.912 ; PROX4.1@112.402,83.192 ccw(c111.804,82.594) 111.804,83.439 ccw(c111.804,84.284) PROX4.1@112.402,83.686 ; P4.1@112.522,74.168 STOP.2@99.568,74.168 98.171,72.771 RESET.1@91.44,72.771 ; P4.1@112.896,73.794 cw(c113.494,73.196) 113.494,74.041 cw(c113.494,74.886) P4.1@112.896,74.288 ; PROX4.1@112.896,83.192 cw(c113.494,82.594) 113.494,83.439 cw(c113.494,84.284) PROX4.1@112.896,83.686 ; PROX3.1@117.99,83.192 ccw(c117.392,82.594) 117.392,83.439 ccw(c117.392,84.284) PROX3.1@117.99,83.686 ; PROX3.1@118.484,83.192 cw(c119.082,82.594) 119.082,83.439 cw(c119.082,84.284) PROX3.1@118.484,83.686 ; 119.66,45.238 ccw(c117.018,47.879) PC2.2@120.754,47.879 ; PC2.2@120.838,48.253 120.253,46.011 ; PC2.2@120.888,48.343 119.082,44.66 ; PC2.2@121.002,47.27 124.165,44.66 ; 121.025,46.603 ccw(c119.75,47.879) PC2.2@121.554,47.879 ; PC2.2@121.031,47.242 122.994,46.011 ; PC2.2@121.694,47.879 ccw(c123.498,47.879) 122.222,46.603 ; PC2.2@122.216,47.242 120.253,46.011 ; PC2.2@122.245,47.27 119.082,44.66 ; PC2.2@122.36,48.343 124.165,44.66 ; PC2.2@122.409,48.253 122.994,46.011 ; 122.421,117.976 INT1.1@124.968,120.269 124.714,120.269 122.174,117.729 122.174,113.665 UV-TR1.1@124.968,110.871 ; PC2.2@122.494,47.879 ccw(c126.229,47.879) 123.588,45.238 ; 122.521,113.318 UV-TR1.1@124.968,110.871 ; PROX2.1@123.832,83.192 ccw(c123.234,82.594) 123.234,83.439 ccw(c123.234,84.284) PROX2.1@123.832,83.686 ; 123.937,119.492 cw(c124.968,118.461) INT1.1@124.968,119.919 ; PROX2.1@124.326,83.192 cw(c124.924,82.594) 124.924,83.439 cw(c124.924,84.284) PROX2.1@124.326,83.686 ; KIPAS.1@124.34,136.913 ccw(c123.742,136.315) 123.742,137.16 ccw(c123.742,138.005) KIPAS.1@124.34,137.407 ; UV-TR1.1@124.618,110.871 ccw(c123.773,110.871) 124.371,111.468 ccw(c124.968,112.066) UV-TR1.1@124.968,111.221 ; UV-TR1.1@124.721,110.624 ccw(c124.123,110.026) 124.123,110.871 ccw(c124.123,111.716) UV-TR1.1@124.721,111.118 ; UV-TR1.1@125.215,110.624 cw(c125.813,110.026) 125.813,110.871 cw(c125.813,111.716) UV-TR1.1@125.215,111.118 ; START.1@129.54,75.088 cw(c129.54,74.243) 130.137,74.841 cw(c130.735,75.438) 129.89,75.438 128.493,74.041 SOUND.1@118.872,74.041 P4.1@112.649,74.041 ; MODE.1@129.674,92.336 ccw(c129.076,91.738) 129.076,92.583 ccw(c129.076,93.428) MODE.1@129.674,92.83 ; 129.675,45.093 ccw(c126.889,47.879) PC1.2@130.829,47.879 ; PROX1.1@129.801,83.192 ccw(c129.203,82.594) 129.203,83.439 ccw(c129.203,84.284) PROX1.1@129.801,83.686 ; MODE.1@129.921,92.583 107.823,92.583 106.172,94.234 106.172,103.124 102.616,106.68 LCD.1@102.108,106.68 ; UV-TR.1@130.182,110.624 ccw(c129.584,110.026) 129.584,110.871 ccw(c129.584,111.716) UV-TR.1@130.182,111.118 ; PROX1.1@130.295,83.192 cw(c130.893,82.594) 130.893,83.439 cw(c130.893,84.284) PROX1.1@130.295,83.686 ; UV-TR.1@130.429,110.871 UV-TR1.1@124.968,110.871 ; INT2.1@130.556,120.269 134.874,120.269 138.811,124.206 138.811,138.303 139.954,139.446 KANAN.50@142.35,139.446 ; INT2.1@130.803,120.022 cw(c131.401,119.424) 131.401,120.269 cw(c131.401,121.114) INT2.1@130.803,120.516 ; PC1.2@130.91,48.246 130.301,45.909 ; PC1.2@130.956,48.332 129.204,44.622 ; 131.041,46.459 ccw(c129.62,47.879) PC1.2@131.629,47.879 ; PC1.2@131.699,47.117 128.778,44.196 124.629,44.196 121.624,47.202 118.618,44.196 115.231,44.196 PC3.2@111.548,47.879 ; PC1.2@132.306,47.256 130.301,45.909 ; PC1.2@132.33,47.28 129.204,44.622 ; KANAN.2@142.102,78.733 cw(c141.505,79.331) 141.505,78.486 cw(c141.505,77.641) 142.102,78.239 cw(c141.505,77.641) 142.35,77.641 cw(c143.195,77.641) KANAN.2@142.597,78.239 ; KANAN.50@142.102,139.199 ccw(c141.505,138.601) 141.505,139.446 ccw(c141.505,140.291) KANAN.50@142.102,139.693 ; 91.013,50.719 PCUBEC.2@93.98,47.752 ; 91.397,71.832 RESET.1@91.44,72.771 ; 91.397,73.71 RESET.1@91.44,72.771 ; 91.44,70.866 RESET.1@91.44,72.771 ; 91.44,70.866 90.17,69.596 87.249,69.596 84.836,67.183 84.836,56.896 PCUBEC.2@93.98,47.752 ; RESET.1@91.44,72.771 91.483,73.71 ; RESET.1@91.44,72.771 92.379,72.814 ; RESET.1@91.44,72.771 92.379,72.728 ; RESET.1@91.44,72.771 91.483,71.832 ; PCUBEC.2@93.98,47.752 95.537,47.824 ; PCUBEC.2@93.98,47.752 95.537,47.68 ; PCUBEC.2@93.98,47.752 102.235,47.752 105.41,44.577 108.246,44.577 PC3.2@111.548,47.879 ; LCD.1@102.108,106.68 104.267,108.839 104.267,124.841 ; 102.997,126.111 104.267,124.841 ; 104.267,124.841 114.681,124.841 116.205,123.317 v1(116.205,112.141) 117.475,110.871 UV-TR1.1@124.968,110.871 ; 108.581,44.912 PC3.2@111.548,47.879 ; 119.082,44.66 PC2.2@121.624,47.879 ; 120.253,46.011 PC2.2@121.624,47.879 ; PC2.2@121.624,47.879 122.994,46.011 ; PC2.2@121.624,47.879 124.165,44.66 ; 129.204,44.622 PC1.2@131.699,47.879 130.301,45.909